# EAGLE board Zaxis2 (EAGLE 9.6.2)
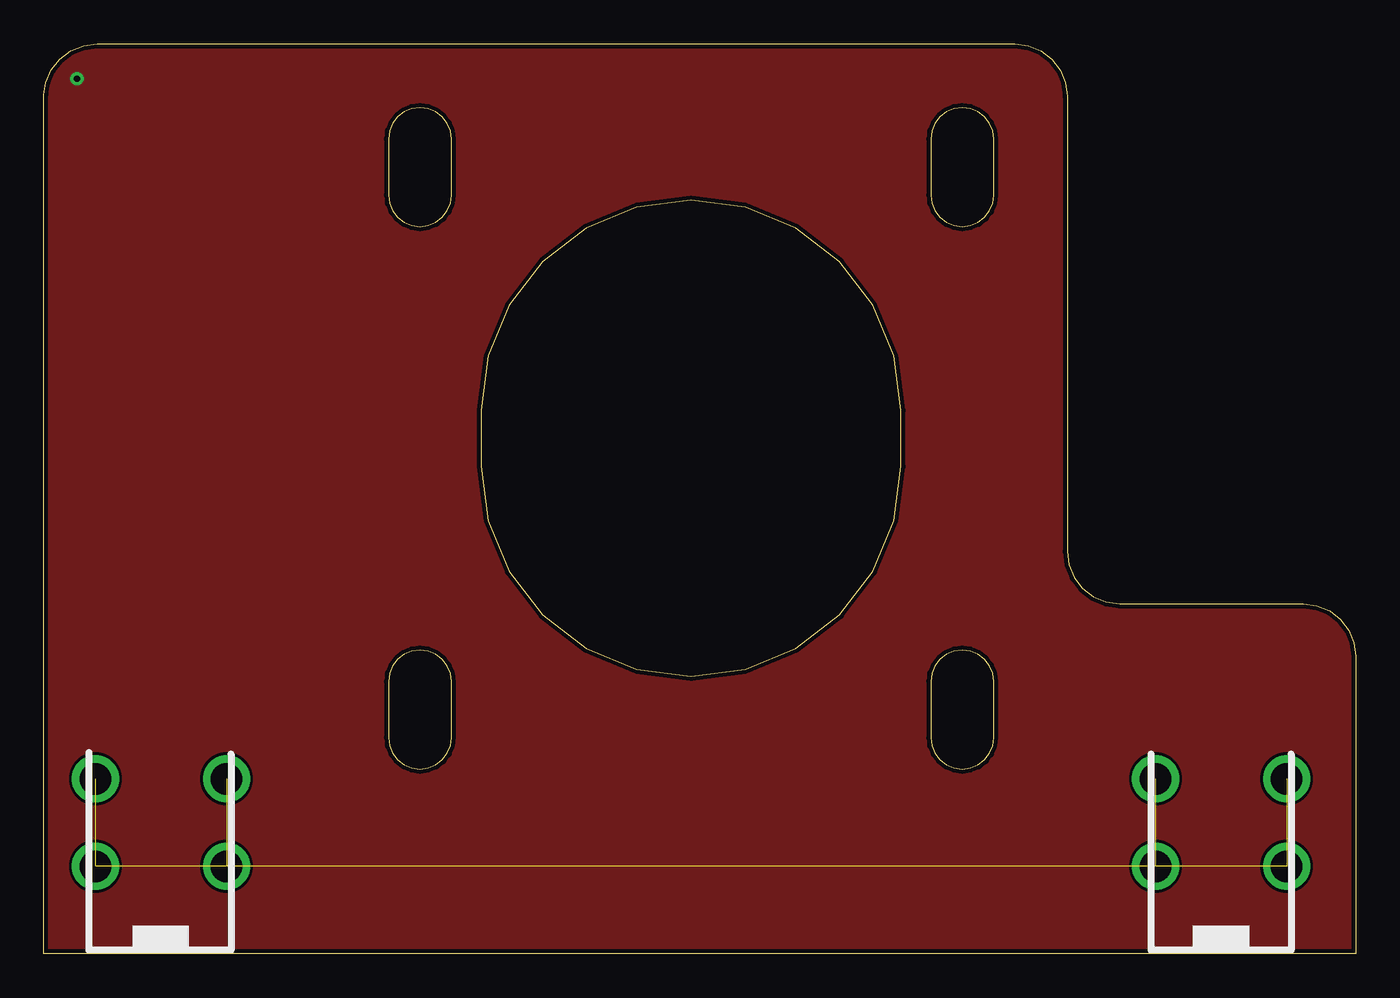
[diagram p0: board, top side]
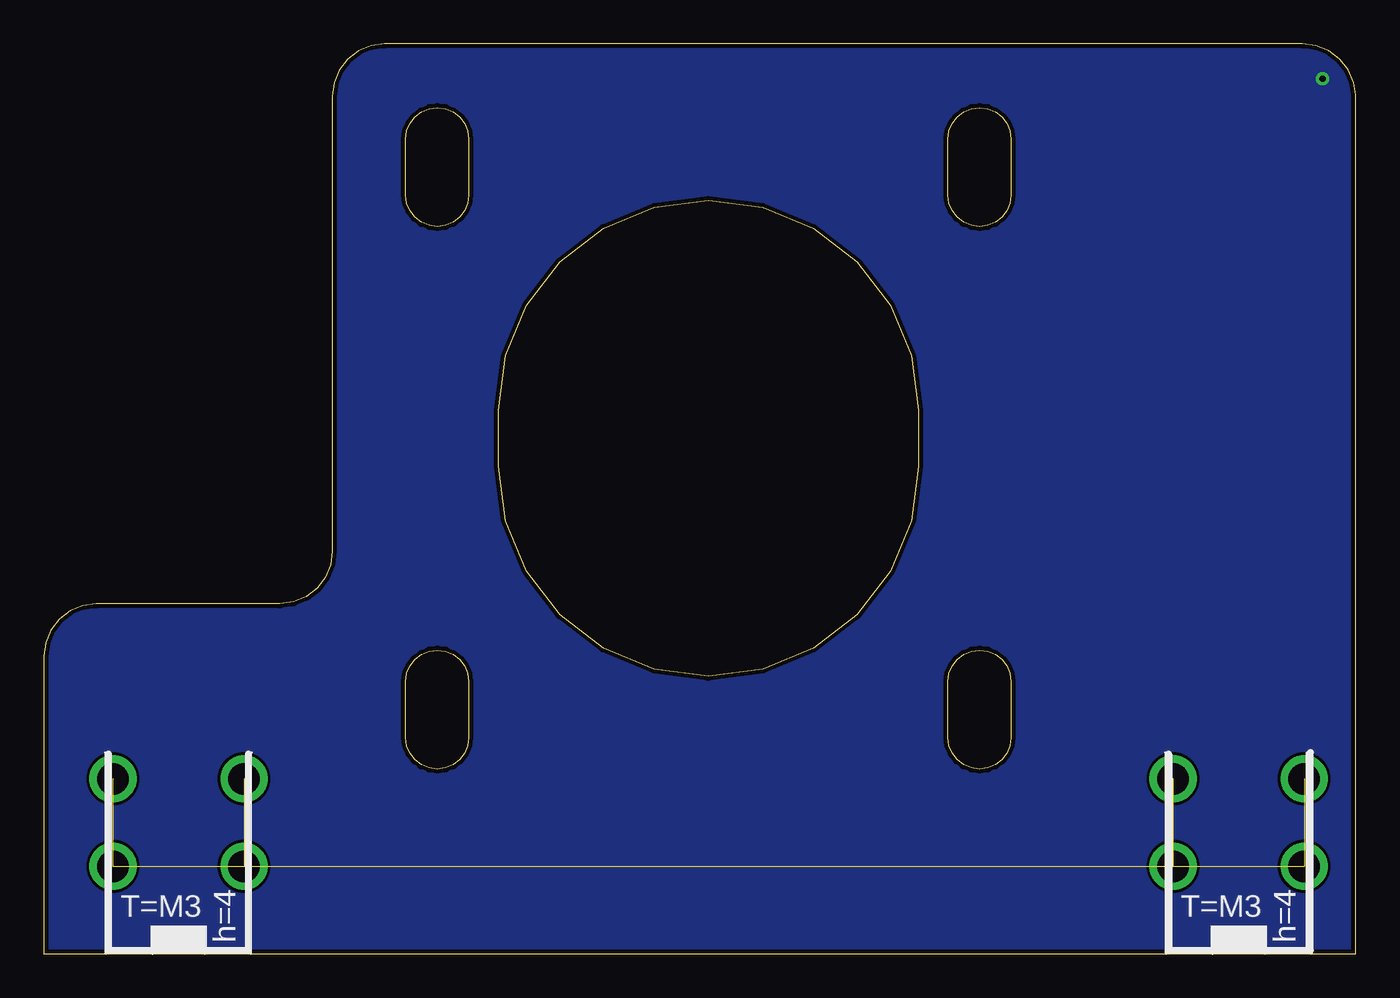
[diagram p1: board, bottom side, seen from below]

Size 75 x 52 mm. Coordinates in mm from the lower left corner, seen from the top.
Outline: 0,49.1 0.12,49.78 0.44,50.5 0.92,51.12 1.56,51.6 2.29,51.9 3.07,52 55.5,52 56.28,51.9 57,51.6 57.63,51.12 58.1,50.5 58.4,49.78 58.5,49 58.5,23 58.61,22.22 58.91,21.5 59.38,20.88 60,20.4 60.73,20.1 61.5,20 72,20 72.78,19.9 73.5,19.6 74.12,19.12 74.6,18.5 74.9,17.78 75,17 75,0 0,0 0,49.1
Outline: 48.6,24.75 49.01,27.85 49.01,31.05 48.6,34.16 47.4,37.05 45.49,39.54 43.01,41.45 40.11,42.64 37.01,43.05 33.9,42.64 31.01,41.45 28.52,39.54 26.61,37.05 25.41,34.16 25.01,31.05 25.01,27.85 25.41,24.75 26.61,21.85 28.52,19.37 31.01,17.46 33.9,16.26 37.01,15.85 40.11,16.26 43.01,17.46 45.49,19.37 47.4,21.85 48.6,24.75
Outline: 23.24,11.89 23.3,12.35 23.3,15.55 23.24,16.02 23.06,16.45 22.78,16.83 22.41,17.11 21.97,17.29 21.5,17.35 21.04,17.29 20.61,17.11 20.23,16.83 19.95,16.45 19.77,16.02 19.7,15.55 19.7,12.35 19.77,11.89 19.95,11.45 20.23,11.08 20.61,10.79 21.04,10.61 21.5,10.55 21.97,10.61 22.41,10.79 22.78,11.08 23.06,11.45 23.24,11.89
Outline: 23.24,42.89 23.3,43.35 23.3,46.55 23.24,47.02 23.06,47.45 22.78,47.83 22.41,48.11 21.97,48.29 21.5,48.35 21.04,48.29 20.61,48.11 20.23,47.83 19.95,47.45 19.77,47.02 19.7,46.55 19.7,43.35 19.77,42.89 19.95,42.45 20.23,42.08 20.61,41.79 21.04,41.61 21.5,41.55 21.97,41.61 22.41,41.79 22.78,42.08 23.06,42.45 23.24,42.89
Outline: 54.24,42.89 54.3,43.35 54.3,46.55 54.24,47.02 54.06,47.45 53.78,47.83 53.41,48.11 52.97,48.29 52.51,48.35 52.04,48.29 51.6,48.11 51.23,47.83 50.95,47.45 50.77,47.02 50.7,46.55 50.7,43.35 50.77,42.89 50.95,42.45 51.23,42.08 51.6,41.79 52.04,41.61 52.51,41.55 52.97,41.61 53.41,41.79 53.78,42.08 54.06,42.45 54.24,42.89
Outline: 54.24,11.89 54.3,12.35 54.3,15.55 54.24,16.02 54.06,16.45 53.78,16.83 53.41,17.11 52.97,17.29 52.51,17.35 52.04,17.29 51.6,17.11 51.23,16.83 50.95,16.45 50.77,16.02 50.7,15.55 50.7,12.35 50.77,11.89 50.95,11.45 51.23,11.08 51.6,10.79 52.04,10.61 52.51,10.55 52.97,10.61 53.41,10.79 53.78,11.08 54.06,11.45 54.24,11.89
Copper layers (1*16): Top 0.035mm / dielectric 1.5mm / Bottom 0.035mm
Design rules "default *": minimum track width 6mil, minimum drill 0.35mm, track to track 6mil, track to pad 6mil, pad to pad 6mil, via to via 6mil, smd to smd 6mil, copper to edge 10mil, drill to drill 6mil, minimum pad ring 10mil, minimum via ring 8mil, stop-mask expansion 4mil, vias tented up to drill 0mil, thermal gap 10mil
Net classes: 0 default: width 0.203 mm, clearance 0.152 mm

## Footprints (pad centres in the part's own frame; a part is rotated, then mirrored left to right if it is on the bottom)
PCB2-M3 = drill 1.8: P$1 -3.75,-5; P$2 3.75,-5; P$3 3.75,-10; P$4 -3.75,-10

## Placement (x,y rotation side)
CON1  PCB-2M3  [PCB2-M3]  67.3,0 180 bottom
CON7  PCB-2M3  [PCB2-M3]  6.7,0 180 bottom

## Library data of the parts
CON1 CON7 = Screw Terminals

## Nets
ZMOTORGND: CON1.P$1 CON1.P$2 CON1.P$3 CON1.P$4 CON7.P$1 CON7.P$2 CON7.P$3 CON7.P$4

## Tracks (layer width: path | path; a pad name or v marks a point on that pad's centre or on a via)
GND  (via drill 0.35)
  other vias: 1.9,50
  pour Top: -2.4,53.1 -2.4,-0.5 -1,-1.9 75.7,-1.9 78.4,0.8 78.4,19.2 74.2,23.4 65.9,23.4 64.8,22.3 62,25.1 62,29.7 62,49.1 62.9,50 59.4,50 54.1,55.3 -0.2,55.3
  pour Bottom: -0.5,51.6 -0.5,-2 0.9,-3.4 77.6,-3.4 80.3,-0.7 80.3,17.7 76.1,21.9 67.8,21.9 66.7,20.8 63.9,23.6 63.9,28.2 63.9,47.6 64.8,48.5 61.3,48.5 56,53.8 1.7,53.8
ZMOTORGND  (7 unrouted)